# EAGLE board -PQ60 EPS FV2 (EAGLE 7.3.0)
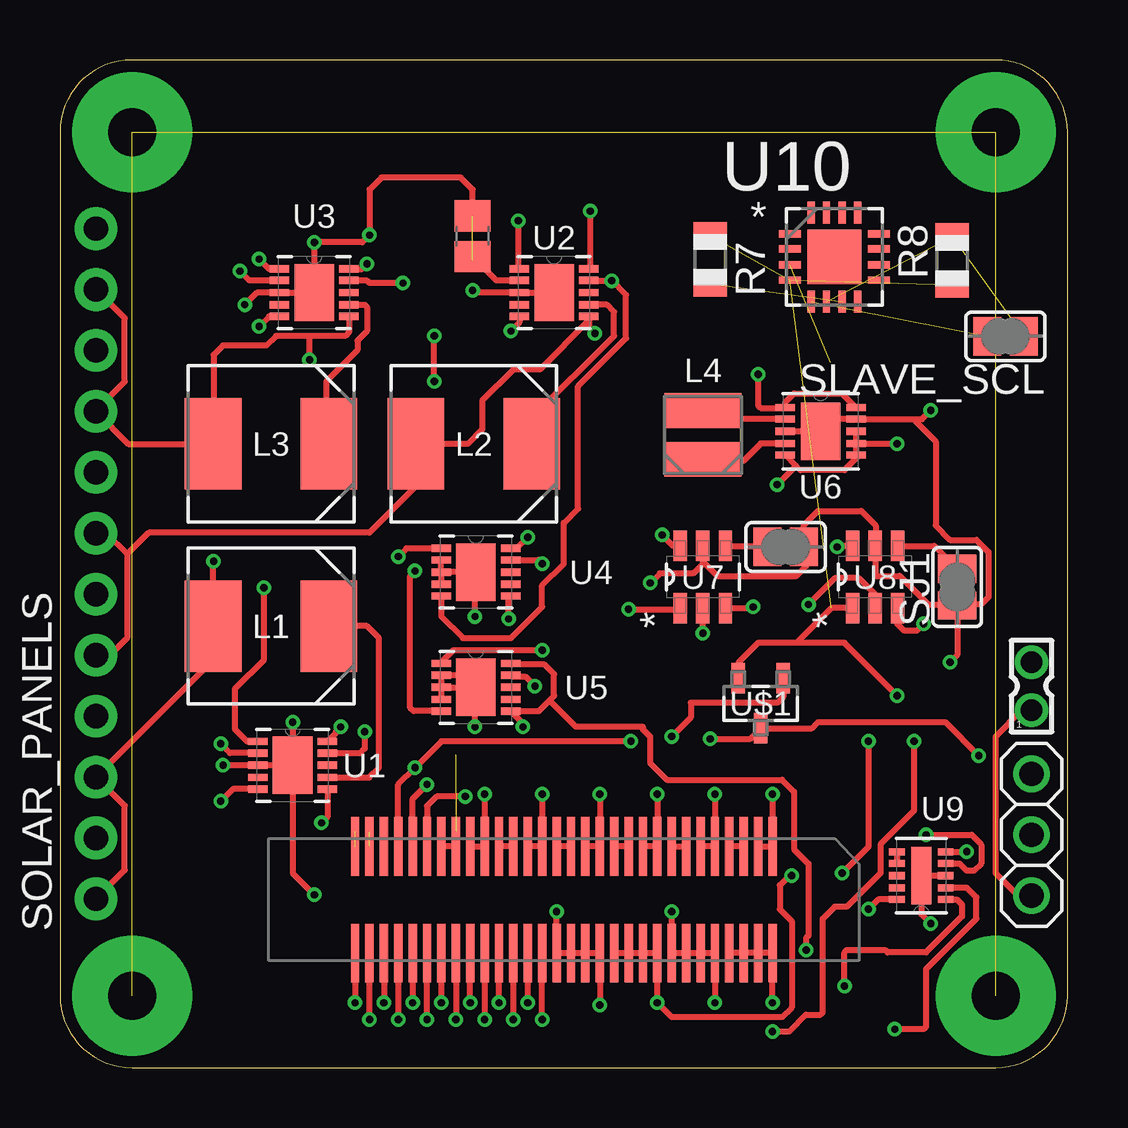
[diagram p0: board, top side]
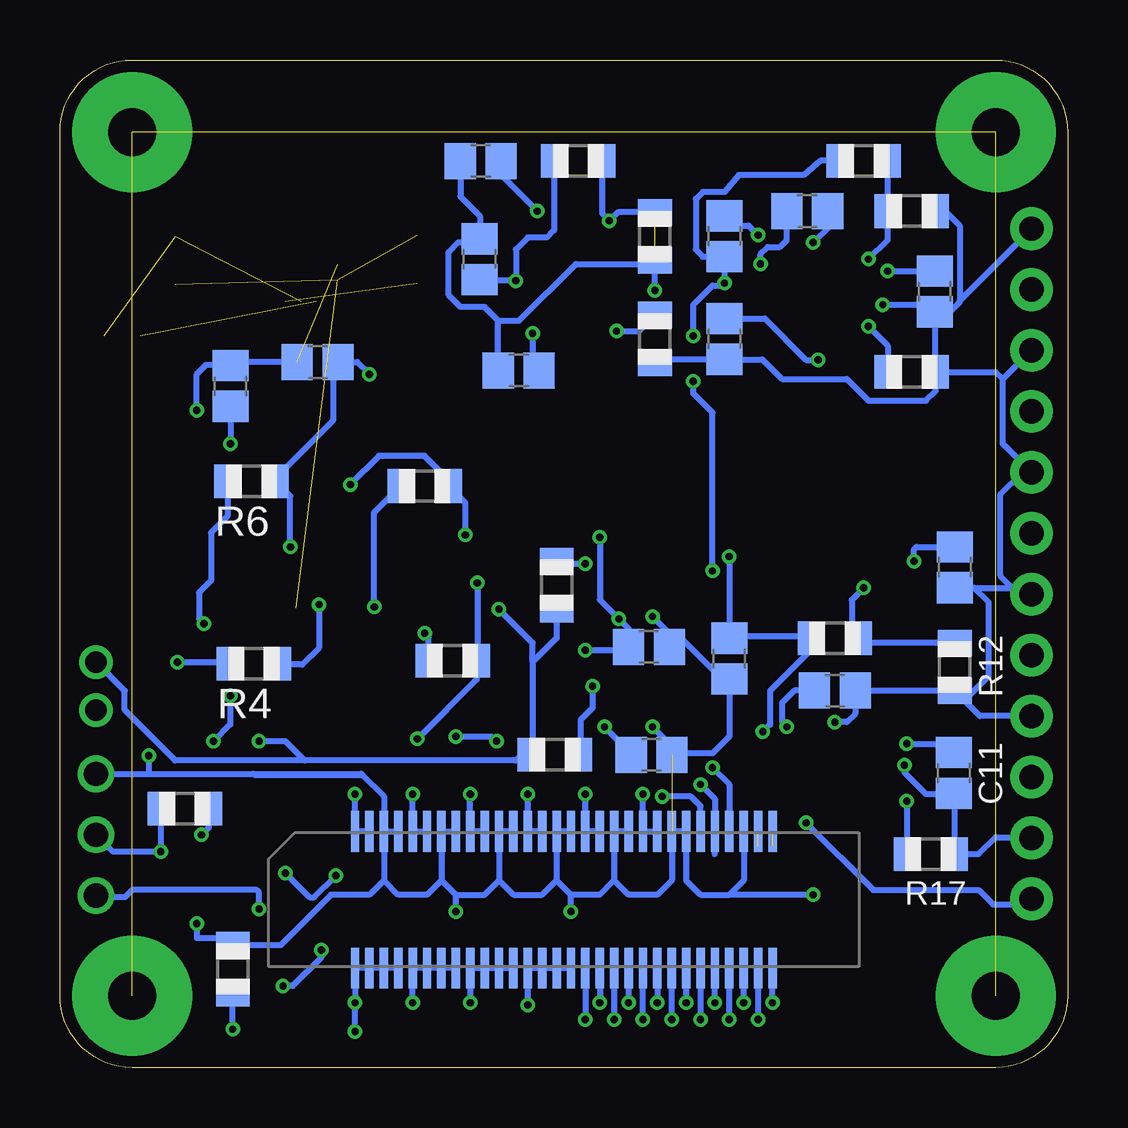
[diagram p1: board, bottom side, seen from below]

Size 42 x 42 mm. Coordinates in mm from the lower left corner, seen from the top.
Outline: 3,0 39,0 arc90 42,3 42,39 arc90 39,42 3,42 arc90 0,39 0,3 arc90 3,0
Copper layers (1*16): Top 0.035mm / dielectric 1.5mm / Bottom 0.035mm
Design rules "SeeedStudio_2layer_DRU_no_angle_20140221 *": minimum track width 6mil, minimum drill 0.3mm, track to track 6mil, track to pad 6mil, pad to pad 6mil, via to via 6mil, smd to smd 0mil, copper to edge 10mil, drill to drill 10mil, minimum pad ring 10mil, minimum via ring 6mil, stop-mask expansion 2mil, vias tented up to drill 100mil, thermal gap 10mil

## Footprints (pad centres in the part's own frame; a part is rotated, then mirrored left to right if it is on the bottom)
1X03 = drill 1.016: 1 -2.54,0; 2 0,0; 3 2.54,0
C0805 = smd 1.3 x 1.5: 1 -0.85,0; 2 0.85,0
IND_ELL6XH = smd 2.362 x 3.81: 1 -2.413,0; 2 2.413,0
IND_ELL3FU = smd 1.448 x 3.2: 1 -1.016,0; 2 1.016,0
R0805 = smd 1.1 x 1.4: 1 -1,0; 2 1,0
SJ = smd 1.168 x 1.6: 1 -0.762,0; 2 0.762,0
1X12-CB = drill 1.016 pad 1.778: 1 -13.97,0; 2 -11.43,0; 3 -8.89,0; 4 -6.35,0; 5 -3.81,0; 6 -1.27,0; 7 1.27,0; 8 3.81,0; 9 6.35,0; 10 8.89,0; 11 11.43,0; 12 13.97,0
332-02 = drill 0.9 pad 1.27: 1 0,-1; 2 0,1
DFN300X300X80-11N = smd 0.813 x 0.305: 1 -1.448,0.991; 2 -1.448,0.508; 3 -1.448,0; 4 -1.448,-0.508; 5 -1.448,-0.991; 6 1.448,-0.991; 7 1.448,-0.508; 8 1.448,0; 9 1.448,0.508; 10 1.448,0.991 | smd 1.651 x 2.388: 11 0,0
SON50P300X300X100-11N = smd 0.813 x 0.305: 1 -1.473,0.991; 2 -1.473,0.508; 3 -1.473,0; 4 -1.473,-0.508; 5 -1.473,-0.991; 6 1.473,-0.991; 7 1.473,-0.508; 8 1.473,0; 9 1.473,0.508; 10 1.473,0.991 | smd 1.651 x 2.388: 11 0,0
SOT95P280X145-6N = smd 1.27 x 0.559: 1 -1.295,0.94; 2 -1.295,0; 3 -1.295,-0.94; 4 1.295,-0.94; 5 1.295,0; 6 1.295,0.94
SON50P200X300X80-11N = smd 0.66 x 0.305: 1 -1.016,0.991; 2 -1.016,0.508; 3 -1.016,0; 4 -1.016,-0.508; 5 -1.016,-0.991; 6 1.016,-0.991; 7 1.016,-0.508; 8 1.016,0; 9 1.016,0.508; 10 1.016,0.991 | smd 0.838 x 2.388: 11 0,0
QFN65P400X400X80-17N = smd 0.914 x 0.305: 1 -1.854,0.965; 2 -1.854,0.33; 3 -1.854,-0.33; 4 -1.854,-0.965; 9 1.854,-0.965; 10 1.854,-0.33; 11 1.854,0.33; 12 1.854,0.965 | smd 0.305 x 0.914: 5 -0.965,-1.854; 6 -0.33,-1.854; 7 0.33,-1.854; 8 0.965,-1.854; 13 0.965,1.854; 14 0.33,1.854; 15 -0.33,1.854; 16 -0.965,1.854 | smd 2.261 x 2.261: 17 0,0
SOT95P237X112-3N = smd 0.559 x 1.27: 1 -0.94,-1.041; 2 0.94,-1.041; 3 0,1.041
FX8C-060S-SV(92) = smd 0.35 x 1.7: P$1 -8.7,2.85; P$2 -8.1,2.85; P$3 -7.5,2.85; P$4 -6.9,2.85; P$5 -6.3,2.85; P$6 -5.7,2.85; P$7 -5.1,2.85; P$8 -4.5,2.85; P$9 -3.9,2.85; P$10 -3.3,2.85; P$11 -2.7,2.85; P$12 -2.1,2.85; P$13 -1.5,2.85; P$14 -0.9,2.85; P$15 -0.3,2.85; P$16 0.3,2.85; P$17 0.9,2.85; P$18 1.5,2.85; P$19 2.1,2.85; P$20 2.7,2.85; P$21 3.3,2.85; P$22 3.9,2.85; P$23 4.5,2.85; P$24 5.1,2.85; P$25 5.7,2.85; P$26 6.3,2.85; P$27 6.9,2.85; P$28 7.5,2.85; P$29 8.1,2.85; P$30 8.7,2.85; P$31 8.7,-2.85; P$32 8.1,-2.85; P$33 7.5,-2.85; P$34 6.9,-2.85; P$35 6.3,-2.85; P$36 5.7,-2.85; P$37 5.1,-2.85; P$38 4.5,-2.85; P$39 3.9,-2.85; P$40 3.3,-2.85; P$41 2.7,-2.85; P$42 2.1,-2.85; P$43 1.5,-2.85; P$44 0.9,-2.85; P$45 0.3,-2.85; P$46 -0.3,-2.85; P$47 -0.9,-2.85; P$48 -1.5,-2.85; P$49 -2.1,-2.85; P$50 -2.7,-2.85; P$51 -3.3,-2.85; P$52 -3.9,-2.85; P$53 -4.5,-2.85; P$54 -5.1,-2.85; P$55 -5.7,-2.85; P$56 -6.3,-2.85; P$57 -6.9,-2.85; P$58 -7.5,-2.85; P$59 -8.1,-2.85; P$60 -8.7,-2.85
FX8C-060P-SV(92) = smd 0.35 x 2.45: P$1 -8.7,-2.225; P$2 -8.1,-2.225; P$3 -7.5,-2.225; P$4 -6.9,-2.225; P$5 -6.3,-2.225; P$6 -5.7,-2.225; P$7 -5.1,-2.225; P$8 -4.5,-2.225; P$9 -3.9,-2.225; P$10 -3.3,-2.225; P$11 -2.7,-2.225; P$12 -2.1,-2.225; P$13 -1.5,-2.225; P$14 -0.9,-2.225; P$15 -0.3,-2.225; P$16 0.3,-2.225; P$17 0.9,-2.225; P$18 1.5,-2.225; P$19 2.1,-2.225; P$20 2.7,-2.225; P$21 3.3,-2.225; P$22 3.9,-2.225; P$23 4.5,-2.225; P$24 5.1,-2.225; P$25 5.7,-2.225; P$26 6.3,-2.225; P$27 6.9,-2.225; P$28 7.5,-2.225; P$29 8.1,-2.225; P$30 8.7,-2.225; P$31 8.7,2.225; P$32 8.1,2.225; P$33 7.5,2.225; P$34 6.9,2.225; P$35 6.3,2.225; P$36 5.7,2.225; P$37 5.1,2.225; P$38 4.5,2.225; P$39 3.9,2.225; P$40 3.3,2.225; P$41 2.7,2.225; P$42 2.1,2.225; P$43 1.5,2.225; P$44 0.9,2.225; P$45 0.3,2.225; P$46 -0.3,2.225; P$47 -0.9,2.225; P$48 -1.5,2.225; P$49 -2.1,2.225; P$50 -2.7,2.225; P$51 -3.3,2.225; P$52 -3.9,2.225; P$53 -4.5,2.225; P$54 -5.1,2.225; P$55 -5.7,2.225; P$56 -6.3,2.225; P$57 -6.9,2.225; P$58 -7.5,2.225; P$59 -8.1,2.225; P$60 -8.7,2.225

## Placement (x,y rotation side)
BATTERY  [1X03]  40.5,9.7 90 top
C1  10uF  [C0805]  14.3,30.37 90 bottom
C2  10uF  [C0805]  22.88,29.06 0 bottom
C3  10uF  [C0805]  4.7,20.85 90 bottom
C4  10uF  [C0805]  14.1,17.05 270 bottom
C5  10uF  [C0805]  24.51,33.69 90 bottom
C6  10uF  [C0805]  14.3,34.65 90 bottom
C7  4.7uF  [C0805]  17.45,17.54 180 bottom
C8  4.7uF  [C0805]  17.34,13.04 180 bottom
C9  10uF  [C0805]  34.89,28.41 270 bottom
C10  10uF  [C0805]  31.26,29.41 0 bottom
C11  4.7uF  [C0805]  4.74,12.28 270 bottom
C12  4.7uF  [C0805]  17.2,34.65 90 top
C13  4.7uF  [C0805]  5.54,32.35 270 bottom
C14  1uF  [C0805]  24.46,37.79 180 bottom
C15  1uF  [C0805]  10.85,35.7 0 bottom
C16  1uF  [C0805]  9.7,15.71 0 bottom
L1  10UH  [IND_ELL6XH]  8.8,18.4 180 top
L2  10UH  [IND_ELL6XH]  17.25,26 180 top
L3  10UH  [IND_ELL6XH]  8.8,26 180 top
L4  2.2UH  [IND_ELL3FU]  26.8,26.37 90 top
R1  470k  [R0805]  21.37,13.04 180 bottom
R2  470k  [R0805]  21.3,20.11 270 bottom
R3  35.7k  [R0805]  25.63,16.96 0 bottom
R4  35.7k  [R0805]  33.92,16.84 180 bottom
R5  35.7k  [R0805]  26.8,24.24 180 bottom
R6  35.7k  [R0805]  34.02,24.44 180 bottom
R7  10k  [R0805]  27.11,33.68 270 top
R8  10k  [R0805]  37.19,33.64 90 top
R9  15k  [R0805]  20.4,37.8 180 bottom
R10  4.7k  [R0805]  17.2,34.65 90 bottom
R11  15k  [R0805]  9.7,17.9 180 bottom
R12  4.7k  [R0805]  4.7,16.7 90 bottom
R13  4.7k  [R0805]  6.5,35.7 180 bottom
R14  15k  [R0805]  8.5,37.8 180 bottom
R15  466k  [R0805]  17.2,30.37 90 bottom
R16  466k  [R0805]  6.5,29 180 bottom
R17  466k  [R0805]  5.7,8.9 180 bottom
R18  487  [R0805]  34.8,4.1 270 bottom
R19  [R0805]  36.8,10.8 180 bottom
SJ1  [SJ]  37.4,20.03 90 top
SJ2  [SJ]  30.25,21.7 180 top
SLAVE_SCL  [SJ]  39.41,30.48 180 top
SOLAR_PANELS  [1X12-CB]  1.5,21 90 top
SWITCH  332-02  [332-02]  40.5,15.9 0 top
U1  LTC3105EDDPBF  [DFN300X300X80-11N]  9.7,12.6 0 top
U2  LTC3105EDDPBF  [DFN300X300X80-11N]  20.6,32.3 0 top
U3  LTC3105EDDPBF  [DFN300X300X80-11N]  10.6,32.3 0 top
U4  LTC4413EDDPBF  [DFN300X300X80-11N]  17.34,20.65 0 top
U5  LTC4413EDDPBF  [DFN300X300X80-11N]  17.34,15.85 0 top
U6  TPS63001DRCR  [SON50P300X300X100-11N]  31.71,26.52 0 top
U7  TPS2552DBVT  [SOT95P280X145-6N]  26.8,20.45 90 top
U8  TPS2552DBVT  [SOT95P280X145-6N]  33.98,20.45 90 top
U9  BQ24210DQCT  [SON50P200X300X80-11N]  35.9,8 180 top
U10  INA3221AIRGVT  [QFN65P400X400X80-17N]  32.28,33.79 0 top
U$1  MCP130T-315I/TT  [SOT95P237X112-3N]  29.21,15.18 180 top
U$2  FX8C-060S-SV(92)  [FX8C-060S-SV(92)]  21,7 0 bottom
U$3  FX8C-060P-SV(92)  [FX8C-060P-SV(92)]  21,7 180 top

## Library data of the parts
BATTERY C1-C16 R1-R19 SOLAR_PANELS = adafruit
L1-L3 = Panasonic-ELL; MPN: ELL6SH100M; OC_FARNELL: 1539555; OC_NEWARK: 95M4201; PACKAGE: SMD; SUPPLIER: PANASONIC
L4 = Panasonic-ELL; CURRENTRATING: 1.6A; MPN: ELL3FU2R2N; OC_FARNELL: 1888686; OC_NEWARK: 56T0899; PACKAGE: SMD-3FU; SUPPLIER: PANASONIC; TOLERANCE: ±30 %
SJ1 SJ2 SLAVE_SCL = jumper
SWITCH = con-garry
U1-U3 = LTC3105; MPN: LTC3105EDD#PBF; OC_FARNELL: 1898600; OC_NEWARK: 27T5809; PACKAGE: DFN-10; SUPPLIER: Linear Technology
U4 U5 = LTC4413; MPN: LTC4413EDD#PBF; OC_FARNELL: 1663736; OC_NEWARK: 56M9529; PACKAGE: DFN-10; SUPPLIER: Linear Technology
U6 = TPS63001; MPN: TPS63001DRCR; OC_FARNELL: -; OC_NEWARK: 85K1711; PACKAGE: SON-10; SUPPLIER: TEXAS INSTRUMENTS
U7 U8 = TPS2552; MPN: TPS2552DBVT; OC_FARNELL: 1694421; OC_NEWARK: 40P3866; PACKAGE: SOT-23-6; SUPPLIER: Texas Instruments
U9 = BQ24210; MPN: BQ24210DQCT; OC_FARNELL: 1903633; OC_NEWARK: 56T0491; PACKAGE: SON-10; SUPPLIER: TEXAS INSTRUMENTS
U10 = INA3221; MPN: INA3221AIRGVT; OC_FARNELL: 2144251; OC_NEWARK: 27W5216; PACKAGE: 16QFN; SUPPLIER: TEXAS INSTRUMENTS
U$1 = MCP130T; MPN: MCP130T-315I/TT; OC_FARNELL: 3021154; OC_NEWARK: 96K3703; PACKAGE: SOT-3; SUPPLIER: Microchip
U$2 U$3 = PQ60

## Nets
!RST: U$1.1 U$2.P$27 U$3.P$27
+3V3: R7.1 R8.1 U8.1 U10.4 U$1.2 U$2.P$57 U$2.P$58 U$2.P$59 U$2.P$60 U$3.P$57 U$3.P$58 U$3.P$59 U$3.P$60
+3V3_SW1: U$2.P$1 U$2.P$2 U$3.P$1 U$3.P$2
+3V3_SW2: U$2.P$5 U$2.P$6 U$3.P$5 U$3.P$6
+3V3_SW3: U$2.P$9 U$2.P$10 U$3.P$9 U$3.P$10
BATTERY: C9.2 R5.1 U6.5 U6.6 U6.7 U6.8 U7.6
BATV: R1.2 R2.2 SWITCH.2 U7.1 U$2.P$49 U$2.P$50 U$2.P$51 U$2.P$52 U$3.P$49 U$3.P$50 U$3.P$51 U$3.P$52
BATV_SW1: U$2.P$13 U$2.P$14 U$3.P$13 U$3.P$14
BATV_SW2: U$2.P$17 U$2.P$18 U$3.P$17 U$3.P$18
BATV_SW3: U$2.P$21 U$2.P$22 U$3.P$21 U$3.P$22
GND: BATTERY.3 C1.1 C2.1 C3.1 C4.2 C5.2 C6.2 C7.1 C8.1 C9.1 C10.1 C11.2 C12.2 C13.2 C14.2 C15.2 C16.2 R3.2 R4.2 R10.1 R12.1 R13.1 R15.1 R16.1 R17.1 R18.1 SJ1.1 SJ2.1 SOLAR_PANELS.2 SOLAR_PANELS.4 SOLAR_PANELS.6 SOLAR_PANELS.8 SOLAR_PANELS.10 SOLAR_PANELS.12 U1.3 U1.11 U2.3 U2.11 U3.3 U3.11 U4.2 U4.3 U4.4 U4.11 U5.2 U5.3 U5.4 U5.11 U6.3 U6.9 U6.11 U7.5 U8.5 U9.3 U10.3 U$1.3 U$2.P$3 U$2.P$4 U$2.P$7 U$2.P$8 U$2.P$11 U$2.P$12 U$2.P$15 U$2.P$16 U$2.P$19 U$2.P$20 U$2.P$23 U$2.P$24 U$2.P$28 U$2.P$45 U$2.P$46 U$2.P$47 U$2.P$48 U$2.P$53 U$2.P$54 U$2.P$55 U$2.P$56 U$3.P$45 U$3.P$46 U$3.P$47 U$3.P$48 U$3.P$53 U$3.P$54 U$3.P$55 U$3.P$56
GPIO0: U$2.P$25 U$3.P$25
GPIO1: U$2.P$26 U$3.P$26
GPIO2: U$2.P$34 U$3.P$34
GPIO3: U$2.P$35 U$3.P$35
GPIO4: U$2.P$36 U$3.P$36
GPIO5: U$2.P$37 U$3.P$37
GPIO6: U$2.P$38 U$3.P$38
GPIO7: U$2.P$39 U$3.P$39
GPIO8: U$2.P$40 U$3.P$40
GPIO9: U$2.P$41 U$3.P$41
GPIO10: U$2.P$42 U$3.P$42
GPIO11: U$2.P$43 U$3.P$43
GPIO12: U$2.P$44 U$3.P$44
I2C_SCL: R8.2 SLAVE_SCL.1 U10.6
I2C_SDA: R7.2 U10.7
MISO: U$2.P$32 U$3.P$32
MOSI: U$2.P$31 U$3.P$31
N$1: L2.1 U2.7
N$2: L3.1 U3.7
N$3: L1.1 U1.7
N$4: L4.1 U6.4
N$5: C4.1 R11.2 U1.9 U4.1
N$6: C5.1 R9.2 U2.9 U4.5
N$7: C6.1 R14.2 U3.9 U5.5
N$8: R4.1 U8.2
N$9: C7.2 U4.6 U4.10 U5.1
N$10: R1.1 U5.9
N$11: R2.1 U4.9
N$12: L4.2 U6.2
N$13: R3.1 U7.2
N$14: R5.2 U7.3
N$15: R6.2 U8.3
N$16: SJ1.2 U8.4
N$17: SJ2.2 U7.4
N$18: SLAVE_SCL.2 U10.5
N$19: C11.1 U1.2
N$20: C12.1 U2.2
N$21: C13.1 U3.2
N$22: C14.1 U2.10
N$23: C15.1 U3.10
N$24: C16.1 U1.10
N$25: R9.1 R10.2 U2.1
N$26: R13.2 R14.1 U3.1
N$27: R11.1 R12.2 U1.1
N$28: R15.2 U2.5
N$29: R16.2 U3.5
N$30: R17.2 U1.5
N$31: C8.2 U5.6 U5.10 U9.1
N$32: U9.6 U9.7
N$33: R18.2 U9.2
N$34: BATTERY.1 SWITCH.1 U9.10
N$35: BATTERY.2 R19.2 U9.5
N$36: R19.1 U9.4
PANEL1+2: C3.2 L1.2 SOLAR_PANELS.1 SOLAR_PANELS.3 U1.6
PANEL3+4: C2.2 L2.2 SOLAR_PANELS.5 SOLAR_PANELS.7 U2.6
PANEL5+6: C1.2 L3.2 SOLAR_PANELS.9 SOLAR_PANELS.11 U3.6
RTN_+3V3_SW1: U$3.P$3 U$3.P$4
RTN_+3V3_SW2: U$3.P$7 U$3.P$8
RTN_+3V3_SW3: U$3.P$11 U$3.P$12
RTN_BATV_SW1: U$3.P$15 U$3.P$16
RTN_BATV_SW2: U$3.P$19 U$3.P$20
RTN_BATV_SW3: U$3.P$23 U$3.P$24
SCK: U$2.P$33 U$3.P$33
SCL: U$2.P$29 U$3.P$29
SDA: U$2.P$30 U$3.P$30
UNPROTECTED3V3: C10.2 R6.1 U6.1 U6.10 U8.6
VIN1+: U10.12
VIN1-: U10.11
VIN2+: U10.15
VIN2-: U10.14
VIN3+: U10.2
VIN3-: U10.1
VPU: U10.16

## Tracks (layer width: path | path; a pad name or v marks a point on that pad's centre or on a via)
!RST  (via drill 0.3)
  Top 0.254: U$1.1 30.15,15.45 29.9,15.2 26.3,15.2 26.3,14.6 v25.5,13.8 | v23.8,13.6 15.9,13.6 v14.8,12.5 14.1,11.8 U$3.P$27
  Bottom 0.254: v25.5,13.8 24,13.8 v23.8,13.6 | v14.8,12.5 14.1,11.8 U$2.P$27
+3V3  (via drill 0.3, 0.3 pad 0.25)  (3 unrouted)
  Top 0.254: U$3.P$57 U$3.P$58 U$3.P$59 U$3.P$60 v29.7,2.7 | 28.27,16.57 U$1.2 28.3,16.25 28.3,16.9 29.1,17.7 30.7,17.7 | v34.9,15.5 32.7,17.7 30.7,17.7 | v35.6,13.6 35.6,10.7 34.2,9.3 34.2,8.1 32.8,6.7 32.3,6.7 31.8,6.2 31.8,2.3 31.7,2.2 31.1,2.2 30.4,1.5 v29.7,1.5 | U8.1 32.16,19.16 30.7,17.7
  Bottom 0.254: U$2.P$57 U$2.P$58 U$2.P$59 U$2.P$60 v29.7,2.7 v29.7,1.5 | v34.9,15.5 34.9,14.3 v35.6,13.6
+3V3_SW1  (via drill 0.3 pad 0.25)
  Top 0.254: U$3.P$2 U$3.P$1 v29.7,11.4
  Bottom 0.254: v29.7,11.4 U$2.P$1 U$2.P$2
+3V3_SW2  (via drill 0.3 pad 0.25)
  Top 0.254: U$3.P$6 U$3.P$5 v27.3,11.4
  Bottom 0.254: U$2.P$6 U$2.P$5 v27.3,11.4
+3V3_SW3  (via drill 0.3 pad 0.25)
  Top 0.254: U$3.P$10 U$3.P$9 v24.9,11.4
  Bottom 0.254: U$2.P$10 U$2.P$9 v24.9,11.4
BATTERY  (via drill 0.3)
  Top 0.254: U6.8 U6.7 | U6.7 U6.6 33.18,25.38 32.7,24.9 30.87,24.9 30.68,25.08 | 30.68,25.08 U6.5 | v34.9,26 33.2,26 U6.7 | U7.6 25.55,21.75 v25.1,22.2 | v29.9,24.3 30.68,25.08
  Bottom 0.254: C9.2 v34.89,26.01 v34.9,26 | v25.1,22.2 25.1,23.54 R5.1 | R5.1 25.8,24 | R5.1 25.8,24.5 26.8,25.5 28.7,25.5 v29.9,24.3
BATV  (via drill 0.3)
  Top 0.254: 24.9,4.8 24.88,4.78 U$3.P$49 U$3.P$50 U$3.P$51 U$3.P$52 v24.9,2.7 25.5,2.1 30.1,2.1 30.5,2.5 30.5,6.1 30,6.6 30,7.6 30.4,8 v30.5,8 | v33.7,13.6 33.7,9.2 v32.6,8.1 | v23.7,19.1 25.81,19.1 U7.1
  Bottom 0.254: U$2.P$49 U$2.P$50 U$2.P$51 U$2.P$52 v24.9,2.7 | SWITCH.2 39.3,15.7 39.3,14.9 37.2,12.8 31.8,12.8 | R2.2 21.3,17.9 22.3,16.9 | 22.3,16.9 22.3,13.11 R1.2 22.76,13.04 23,12.8 31.8,12.8 | 31.8,12.8 32.6,13.6 v33.7,13.6 | v32.6,8.1 31.6,7.1 31.4,7.1 v30.5,8 | 22.3,16.9 22.3,17.7 v23.7,19.1
BATV_SW1  (via drill 0.3 pad 0.25)
  Top 0.254: U$3.P$14 U$3.P$13 v22.5,11.4
  Bottom 0.254: U$2.P$14 U$2.P$13 v22.5,11.4
BATV_SW2  (via drill 0.3 pad 0.25)
  Top 0.254: U$3.P$18 U$3.P$17 v20.1,11.4
  Bottom 0.254: U$2.P$18 U$2.P$17 v20.1,11.4
BATV_SW3  (via drill 0.3 pad 0.25)
  Top 0.254: U$3.P$22 U$3.P$21 v17.7,11.4
  Bottom 0.254: U$2.P$22 U$2.P$21 v17.7,11.4
CHASSIS_GND  (via drill 2 pad 5)  (3 unrouted)
  other vias: 3,39 39,39 39,3 3,3
GND  (via drill 0.3, 0.3 pad 0.25)  (3 unrouted)
  Top 0.254: v27.3,2.7 U$3.P$56 U$3.P$55 U$3.P$54 U$3.P$53 v25.5,6.5 | U2.11 U2.3 17.3,32.3 v17.2,32.4 | U1.11 U1.3 v6.8,12.6 | v7.7,31.8 8.2,32.3 U3.3 U3.11 v10.6,34.4 12.6,34.4 v12.9,34.7 12.9,36.6 13.4,37.1 16.7,37.1 17.2,36.6 C12.2 | v22.5,2.6 U$3.P$48 U$3.P$47 U$3.P$46 U$3.P$45 v20.7,6.5 | U1.11 9.7,8.1 v10.6,7.2 | v9.7,14.4 U1.11 | U4.3 U4.11 17.3,20.61 v17.3,18.8 | U4.3 U4.2 | U4.3 U4.4 | U5.3 U5.11 17.3,15.81 v17.3,14.2 | U5.3 U5.2 17.34,16.36 17.6,16.1 16.9,16.1 16.6,16.4 16.8,16.4 17.6,15.6 | U5.3 U5.4 | U9.3 35.9,8 35.9,6.4 v36.3,6 | v38.3,13 36.9,14.4 31.6,14.4 31.34,14.14 U$1.3 28.77,13.7 v27.1,13.7 | U6.3 U6.11 32.22,27.03 U6.9 | U6.9 35.93,27.03 v36.3,27.4 | v24.6,20.2 25,20.6 26.4,20.6 26.8,21 U7.5 26.8,21.1 27.4,20.5 30.7,20.5 31.1,20.9 31.1,21.61 SJ2.1 31.01,22.61 31.6,23.2 33.4,23.2 34,22.6 34,21.77 U8.5 33.98,20.52 34,20.5 35,20.5 36.2,19.3 37.1,19.3 | 37.1,19.3 37.37,19.3 SJ1.1 37.43,19.3 38.4,19.3 38.7,19.6 38.7,21.5 38.2,22 37.1,22 36.5,22.6 36.5,26.1 35.57,27.03 U6.9 | 37.1,19.3 37.4,19 37.4,17.2 v37.1,16.9
  Bottom 0.254: U$2.P$3 U$2.P$4 | U$2.P$8 U$2.P$7 26.1,7.8 | U$2.P$53 U$2.P$54 U$2.P$55 U$2.P$56 v27.3,2.7 | U$2.P$48 U$2.P$47 U$2.P$46 U$2.P$45 | U$2.P$12 U$2.P$11 23.7,7.8 | U$2.P$16 U$2.P$15 21.3,7.8 | U$2.P$20 U$2.P$19 18.9,7.8 | C13.2 6.2,31.8 | v7.7,31.8 5.84,31.8 C13.2 | C15.2 10,35 v10.6,34.4 | C13.2 5.54,29.04 R16.1 | R13.1 5.1,35.7 4.5,35.1 4.5,31.97 | C13.2 4.9,31.5 4.5,31.9 4.5,31.97 | 18.9,7.8 19.5,7.2 20.7,7.2 | 20.7,7.2 21.3,7.8 | 21.3,7.8 21.9,7.2 23.1,7.2 23.7,7.8 | 23.7,7.8 24.3,7.2 25.5,7.2 | 26.1,7.8 25.5,7.2 | 26.1,7.8 26.7,7.2 27.9,7.2 28.5,7.8 | U$2.P$3 28.5,7.8 | v22.5,2.6 U$2.P$48 | 22.5,4.7 U$2.P$48 | v20.7,6.5 20.7,7.2 | v25.5,6.5 25.5,7.2 | U$2.P$28 13.5,7.8 14.1,7.2 | 14.1,7.2 15.3,7.2 15.9,7.8 U$2.P$24 U$2.P$23 16.5,7.8 17.1,7.2 18.3,7.2 18.9,7.8 | v10.6,7.2 14.1,7.2 | C4.2 14.4,16.2 | v6.8,12.6 6.8,12.3 5.9,11.4 4.77,11.4 C11.2 4.7,11.39 R17.1 3.7,8.9 3,9.6 1.53,9.6 SOLAR_PANELS.2 | SOLAR_PANELS.4 3.65,14.65 4.3,15.3 | 4.3,15.3 R12.1 C16.2 8.85,14.75 9.2,14.4 v9.7,14.4 | 4.3,15.3 3.3,16.3 3.3,19.4 3.9,20 C3.1 1.77,20 SOLAR_PANELS.6 2.03,19.73 2.8,20.5 2.8,23.9 1.89,24.81 SOLAR_PANELS.8 2.6,25.91 2.61,25.91 2.7,26 2.7,28.69 | C4.2 14.1,15.7 | R16.1 5.5,28.2 5.9,27.8 8.3,27.8 9.2,28.7 11.9,28.7 12.72,29.52 C1.1 17.05,29.52 R15.1 | C6.2 13.9,35.1 13.3,35.1 v12.9,34.7 | SOLAR_PANELS.12 4.5,31.97 | SOLAR_PANELS.10 2.7,28.69 | R16.1 3.01,29 2.7,28.69 | R10.1 17.05,33.65 | C14.2 25.31,36.31 24.5,35.5 C5.2 24.65,34.4 25.4,34.4 25.8,34 25.8,32.2 25.3,31.7 24.3,31.7 23.73,31.13 | 14.3,16.4 C4.2 | v17.3,18.8 16.6,18.1 C7.1 16.36,17.54 16.05,17.85 14.4,16.2 | C2.1 23.73,31.13 | v17.2,32.4 R10.1 | v17.3,14.2 16.49,13.39 C8.1 16.43,13.1 14.8,13.1 14.1,13.8 14.1,15.7
  Bottom 0.254: 14.4,16.2 14.4,16 14.1,15.7 | 23.73,31.13 22.87,31.13 20.5,33.5 17.35,33.5 R10.1 | 33.94,12.24 29.44,12.24 29.4,12.2 | v36.3,6 36.3,5.4 35.1,5.4 R18.1 32.8,5.1 30.7,7.2 29.1,7.2 28.5,7.8 | BATTERY.3 38.3,12.24 | 38.3,12.24 33.94,12.24 | 33.94,12.24 33.9,12.2 29.4,12.2 | 29.4,12.2 28.5,11.3 U$2.P$3 | v38.3,13 38.3,12.24 | C10.1 34.74,29.41 C9.1 34.93,29.3 35.9,29.3 36.3,28.9 v36.3,27.4 | v24.6,20.2 24.6,16.99 R3.2 24.63,16.17 v27.1,13.7 | v37.1,16.9 34.98,16.9 R4.2
GPIO0  (via drill 0.3)
  Top 0.254: v16.9,11.3 15.7,11.3 15.3,10.9 U$3.P$25
  Bottom 0.254: U$2.P$25 15.3,10.9 15.7,11.3 v16.9,11.3
GPIO1  (via drill 0.3)
  Top 0.254: U$3.P$26 14.7,11.2 v15.3,11.8
  Bottom 0.254: v15.3,11.8 14.7,11.2 U$2.P$26 14.7,8.9
GPIO2  (via drill 0.3 pad 0.25)
  Top 0.254: U$3.P$34 v14.1,2
  Bottom 0.254: v14.1,2 U$2.P$34
GPIO3  (via drill 0.3 pad 0.25)
  Top 0.254: U$3.P$35 v14.7,2.7
  Bottom 0.254: v14.7,2.7 U$2.P$35
GPIO4  (via drill 0.3 pad 0.25)
  Top 0.254: v15.3,2 U$3.P$36
  Bottom 0.254: U$2.P$36 v15.3,2
GPIO5  (via drill 0.3 pad 0.25)
  Top 0.254: v15.9,2.7 U$3.P$37
  Bottom 0.254: U$2.P$37 v15.9,2.7
GPIO6  (via drill 0.3 pad 0.25)
  Top 0.254: U$3.P$38 v16.5,2
  Bottom 0.254: v16.5,2 U$2.P$38
GPIO7  (via drill 0.3 pad 0.25)
  Top 0.254: v17.1,2.7 U$3.P$39
  Bottom 0.254: U$2.P$39 v17.1,2.7
GPIO8  (via drill 0.3 pad 0.25)
  Top 0.254: U$3.P$40 v17.7,2
  Bottom 0.254: v17.7,2 U$2.P$40
GPIO9  (via drill 0.3 pad 0.25)
  Top 0.254: v18.3,2.7 U$3.P$41
  Bottom 0.254: U$2.P$41 v18.3,2.7
GPIO10  (via drill 0.3 pad 0.25)
  Top 0.254: v18.9,2 U$3.P$42
  Bottom 0.254: U$2.P$42 v18.9,2
GPIO11  (via drill 0.3 pad 0.25)
  Top 0.254: v19.5,2.7 U$3.P$43
  Bottom 0.254: U$2.P$43 v19.5,2.7
GPIO12  (via drill 0.3 pad 0.25)
  Top 0.254: v20.1,2 U$3.P$44
  Bottom 0.254: U$2.P$44 v20.1,2
I2C_SCL  (2 unrouted)
I2C_SDA  (1 unrouted)
MISO  (via drill 0.3 pad 0.25)
  Top 0.254: v12.9,2 U$3.P$32
  Bottom 0.254: U$2.P$32 v12.9,2
MOSI  (via drill 0.3 pad 0.25)
  Top 0.254: U$3.P$31 v12.3,2.7
  Bottom 0.254: v12.3,2.7 U$2.P$31
N$1
  Top 0.254: L2.1 19.66,27.06 23.1,30.5 23.1,31.5 22.8,31.8 U2.7
N$2
  Top 0.254: U3.7 12.71,31.79 12.8,31.7 12.8,30.7 12.4,30.3 12.4,29.9 11.1,28.6 11.1,26.11 L3.1
N$3
  Top 0.254: U1.7 12.89,12.09 13.3,12.5 13.3,17.9 12.8,18.4 L1.1
N$4
  Top 0.254: U6.4 29.21,26.01 28.5,25.3 26.9,25.3 L4.1
N$5  (via drill 0.3)
  Top 0.254: v12.7,14 12.7,13.3 12.5,13.1 U1.9 | U4.1 14.44,21.64 v14.1,21.3
  Bottom 0.254: v12.7,14 12.4,14.3 12.4,15.7 10.7,17.4 R11.2 10.8,18 13.7,18 13.8,17.9 C4.1 v14.1,21.3
N$6  (via drill 0.3)
  Top 0.254: U2.9 v22.99,32.81 v23,32.8 23.6,32.2 23.6,30.4 21.6,28.4 21.6,23.3 21,22.7 21,21 20.1,20.1 20.1,19.2 18.8,17.9 16.8,17.9 15.89,18.81 U4.5
  Bottom 0.254: C5.1 24.47,32.8 v23,32.8 23,34.1 22.5,34.6 21.7,34.6 21.4,34.9 R9.2
N$7  (via drill 0.3)
  Top 0.254: v14.3,32.7 12.9,32.7 12.8,32.8 U3.9 | v14.8,20.7 14.6,20.5 14.6,15 14.74,14.86 U5.5 | v15.6,28.6 v15.6,30.5
  Bottom 0.254: R14.2 10.3,37.8 11,37.2 13.7,37.2 14.3,36.5 15.2,36.5 15.5,36.2 15.5,34.1 15.2,33.8 C6.1 v14.3,32.7 14.4,32.6 14.8,32.6 15.6,31.8 v15.6,30.5 | v14.8,20.7 14.8,27.3 15.6,28.1 v15.6,28.6
N$8  (via drill 0.3)
  Top 0.254: U8.2 33.98,19.72 33.3,20.4 32.3,20.4 v31.2,19.3
  Bottom 0.254: v31.2,19.3 31.2,17.5 31.9,16.8 32.88,16.8 R4.1
N$9  (via drill 0.3)
  Top 0.254: v18.7,18.7 18.7,19.57 U4.6 | U4.10 19.04,21.64 v19.5,22.1 | U5.1 15.89,16.89 16.4,17.4 v20.1,17.4
  Bottom 0.254: v19.5,22.1 19.5,19.5 v18.7,18.7 18.3,18.3 C7.2 18.44,17.4 v20.1,17.4
N$10  (via drill 0.3)
  Top 0.254: U5.9 18.85,16.3 19.4,16.3 v19.8,15.9
  Bottom 0.254: v19.8,15.9 19.8,15 20.3,14.5 20.3,13.11 R1.1
N$11  (via drill 0.3)
  Top 0.254: U4.9 19.94,21.16 v20.1,21
  Bottom 0.254: v20.1,21 21.19,21 R2.1
N$12
  Top 0.254: U6.2 27.21,27.03 L4.2
N$13  (via drill 0.3)
  Top 0.254: v26.8,18.1 U7.2
  Bottom 0.254: R3.1 26.63,17.93 v26.8,18.1
N$14  (via drill 0.3)
  Top 0.254: U7.3 28.86,19.16 v28.9,19.2
  Bottom 0.254: v28.9,19.2 28.9,23.14 R5.2
N$15  (via drill 0.3)
  Top 0.254: v36,18.5 35.7,18.2 35.2,18.2 34.9,18.5 34.9,19.14 U8.3
  Bottom 0.254: R6.2 35.02,22.98 35.7,22.3 35.7,20.3 36.2,19.8 36.2,18.7 v36,18.5
N$16
  Top 0.254: U8.4 36.45,21.75 SJ1.2
N$17
  Top 0.254: U7.4 29.44,21.75 SJ2.2
N$18  (1 unrouted)
N$19  (via drill 0.3)
  Top 0.254: U1.2 7.09,13.11 v6.7,13.5
  Bottom 0.254: v6.7,13.5 5.11,13.5 C11.1
N$20
  Top 0.254: U2.2 18.19,32.81 C12.1
N$21  (via drill 0.3)
  Top 0.254: U3.2 7.89,32.81 v7.5,33.2
  Bottom 0.254: v7.5,33.2 C13.1
N$22  (via drill 0.3)
  Top 0.254: v22.1,35.7 22.1,33.34 U2.10
  Bottom 0.254: C14.1 23.61,37.21 v22.1,35.7
N$23  (via drill 0.3)
  Top 0.254: U3.10 12.59,33.29 v12.8,33.5
  Bottom 0.254: v12.8,33.5 12.8,33.9 12.5,34.2 12,34.2 11.7,34.5 C15.1
N$24  (via drill 0.3)
  Top 0.254: v11.7,14.2 11.5,14 11.5,13.94 U1.10
  Bottom 0.254: C16.1 11.39,15.71 11.9,15.2 11.9,14.4 v11.7,14.2
N$25  (via drill 0.3)
  Top 0.254: v19.1,35.3 19.1,33.34 U2.1
  Bottom 0.254: R10.2 18.75,35.65 v19.1,35.3 19.4,35.6 R9.1
N$26  (via drill 0.3)
  Top 0.254: U3.1 8.71,33.29 v8.3,33.7
  Bottom 0.254: v8.3,33.7 7.5,34.5 R13.2 R14.1
N$27  (via drill 0.3)
  Top 0.254: U1.1 7.81,13.59 7.3,14.1 7.3,15.8 8.5,17 v8.5,20
  Bottom 0.254: R12.2 8.5,17.7 R11.1 9,18.2 9,19.5 v8.5,20
N$28  (via drill 0.3)
  Top 0.254: U2.5 19.15,31.05 v18.8,30.7
  Bottom 0.254: v18.8,30.7 17.87,30.7 R15.2
N$29  (via drill 0.3)
  Top 0.254: U3.5 8.71,31.31 v8.3,30.9
  Bottom 0.254: v8.3,30.9 7.5,30.1 R16.2
N$30  (via drill 0.3)
  Top 0.254: U1.5 7.21,11.61 v6.7,11.1
  Bottom 0.254: v6.7,11.1 R17.2
N$31  (via drill 0.3)
  Top 0.254: v19.3,14.2 19.3,14.35 U5.6 19.96,14.86 20.4,15.3 | 20.4,15.3 20.6,15.5 20.6,16.4 20.2,16.8 18.83,16.8 U5.10 | U9.1 37.39,7.01 37.6,6.8 37.6,6.3 36.1,4.8 34.5,4.8 34.4,4.9 32.8,4.9 32.7,4.8 v32.7,3.4 | 20.4,15.3 21.5,14.2 24.3,14.2 24.3,14.1 24.6,13.8 24.6,12.7 25.3,12 30.1,12 30.6,11.5 30.6,9.1 31.2,8.5 31.2,5.5 31.1,5.4 v31.1,4.9
  Bottom 0.254: C8.2 18.19,13.09 v19.3,14.2 | v31.1,4.9 31.1,4.6 32.3,3.4 v32.7,3.4
N$32
  Top 0.254: U9.6 U9.7
N$33  (via drill 0.3)
  Top 0.254: U9.2 37.8,7.5 38.2,7.1 38.2,6.2 36.1,4.1 36.1,1.7 36,1.6 v34.8,1.6
  Bottom 0.254: v34.8,1.6 R18.2
N$34  (via drill 0.3)
  Top 0.254: BATTERY.1 39.94,7.16 39,8.1 39,13.8 40.1,14.9 SWITCH.1 | U9.10 34.11,7.01 v33.7,6.6
  Bottom 0.254: v33.7,6.6 33.7,7.3 33.8,7.4 39,7.4 39.3,7.1 40.44,7.1 BATTERY.1
N$35  (via drill 0.3)
  Top 0.254: U9.5 v37.79,8.99 v37.8,9
  Bottom 0.254: BATTERY.2 39.8,9 v37.8,9 R19.2
N$36  (via drill 0.3)
  Top 0.254: v36.1,9.7 38,9.7 38.4,9.3 38.4,8.5 38.1,8.2 37.8,8.2 37.5,8.5 U9.4
  Bottom 0.254: R19.1 35.8,10 v36.1,9.7
PANEL1+2  (via drill 0.3)
  Top 0.254: SOLAR_PANELS.1 2.7,8.23 2.7,10.91 SOLAR_PANELS.3 6.39,17 L1.2 6.39,21.09 v6.4,21.1 | U1.6 11.15,10.45 v10.9,10.2
  Bottom 0.254: v6.4,21.1 6.4,21.6 6.3,21.7 C3.2 | v10.9,10.2 8.1,7.4 3.7,7.4 3.1,6.8 1.73,6.8 SOLAR_PANELS.1
PANEL3+4  (via drill 0.3)
  Top 0.254: SOLAR_PANELS.7 1.93,22.27 2.8,21.4 | 2.8,21.4 2.8,17.9 2.09,17.19 SOLAR_PANELS.5 | 2.8,21.4 3.7,22.3 12.9,22.3 14.84,24.24 L2.2 17,26 17.6,26.6 17.6,27.8 18.9,29.1 20,29.1 22.05,31.15 U2.6 22.05,30.85 v22.3,30.6
  Bottom 0.254: v22.3,30.6 22.3,29.33 C2.2
PANEL5+6  (via drill 0.3)
  Top 0.254: U3.6 12.05,30.65 11.9,30.5 10.3,30.5 | 10.3,30.5 9,30.5 8.6,30.1 6.8,30.1 6.4,29.7 6.4,26.01 L3.2 2.85,26 SOLAR_PANELS.9 1.5,27.4 2.7,28.6 2.7,31.23 SOLAR_PANELS.11 | v10.4,29.5 10.4,30.4 10.3,30.5
  Bottom 0.254: C1.2 12.62,31.22 10.9,29.5 v10.4,29.5
RTN_+3V3_SW1
  Top 0.254: U$3.P$3 U$3.P$4
RTN_+3V3_SW2
  Top 0.254: U$3.P$8 U$3.P$7
RTN_+3V3_SW3
  Top 0.254: U$3.P$11 U$3.P$12
RTN_BATV_SW1
  Top 0.254: U$3.P$15 U$3.P$16
RTN_BATV_SW2
  Top 0.254: U$3.P$19 U$3.P$20
RTN_BATV_SW3
  Top 0.254: U$3.P$23 U$3.P$24
SCK  (via drill 0.3 pad 0.25)
  Top 0.254: U$3.P$33 v13.5,2.7
  Bottom 0.254: v13.5,2.7 U$2.P$33
SCL  (1 unrouted)
SDA  (1 unrouted)
UNPROTECTED3V3  (via drill 0.3)
  Top 0.254: v29.1,28.9 29.1,27.6 29.2,27.5 30.23,27.5 U6.1 30.24,27.74 30.6,28.1 32.59,28.1 U6.10 | U8.6 32.45,21.75 v32.4,21.7
  Bottom 0.254: v29.1,28.9 29.61,29.41 C10.2 30.6,29.22 30.6,27 33.02,24.58 R6.1 32.4,23.82 v32.4,21.7